# Altium PCB PCB1.PcbDoc
Units mm, origin at the board's own origin, x right, y up, seen from the top; angles counter-clockwise.
Board outline 50 x 50 mm, 2 copper layers (Top Layer, Bottom Layer); 23 components, 14 nets, 73 pads, 4 vias.
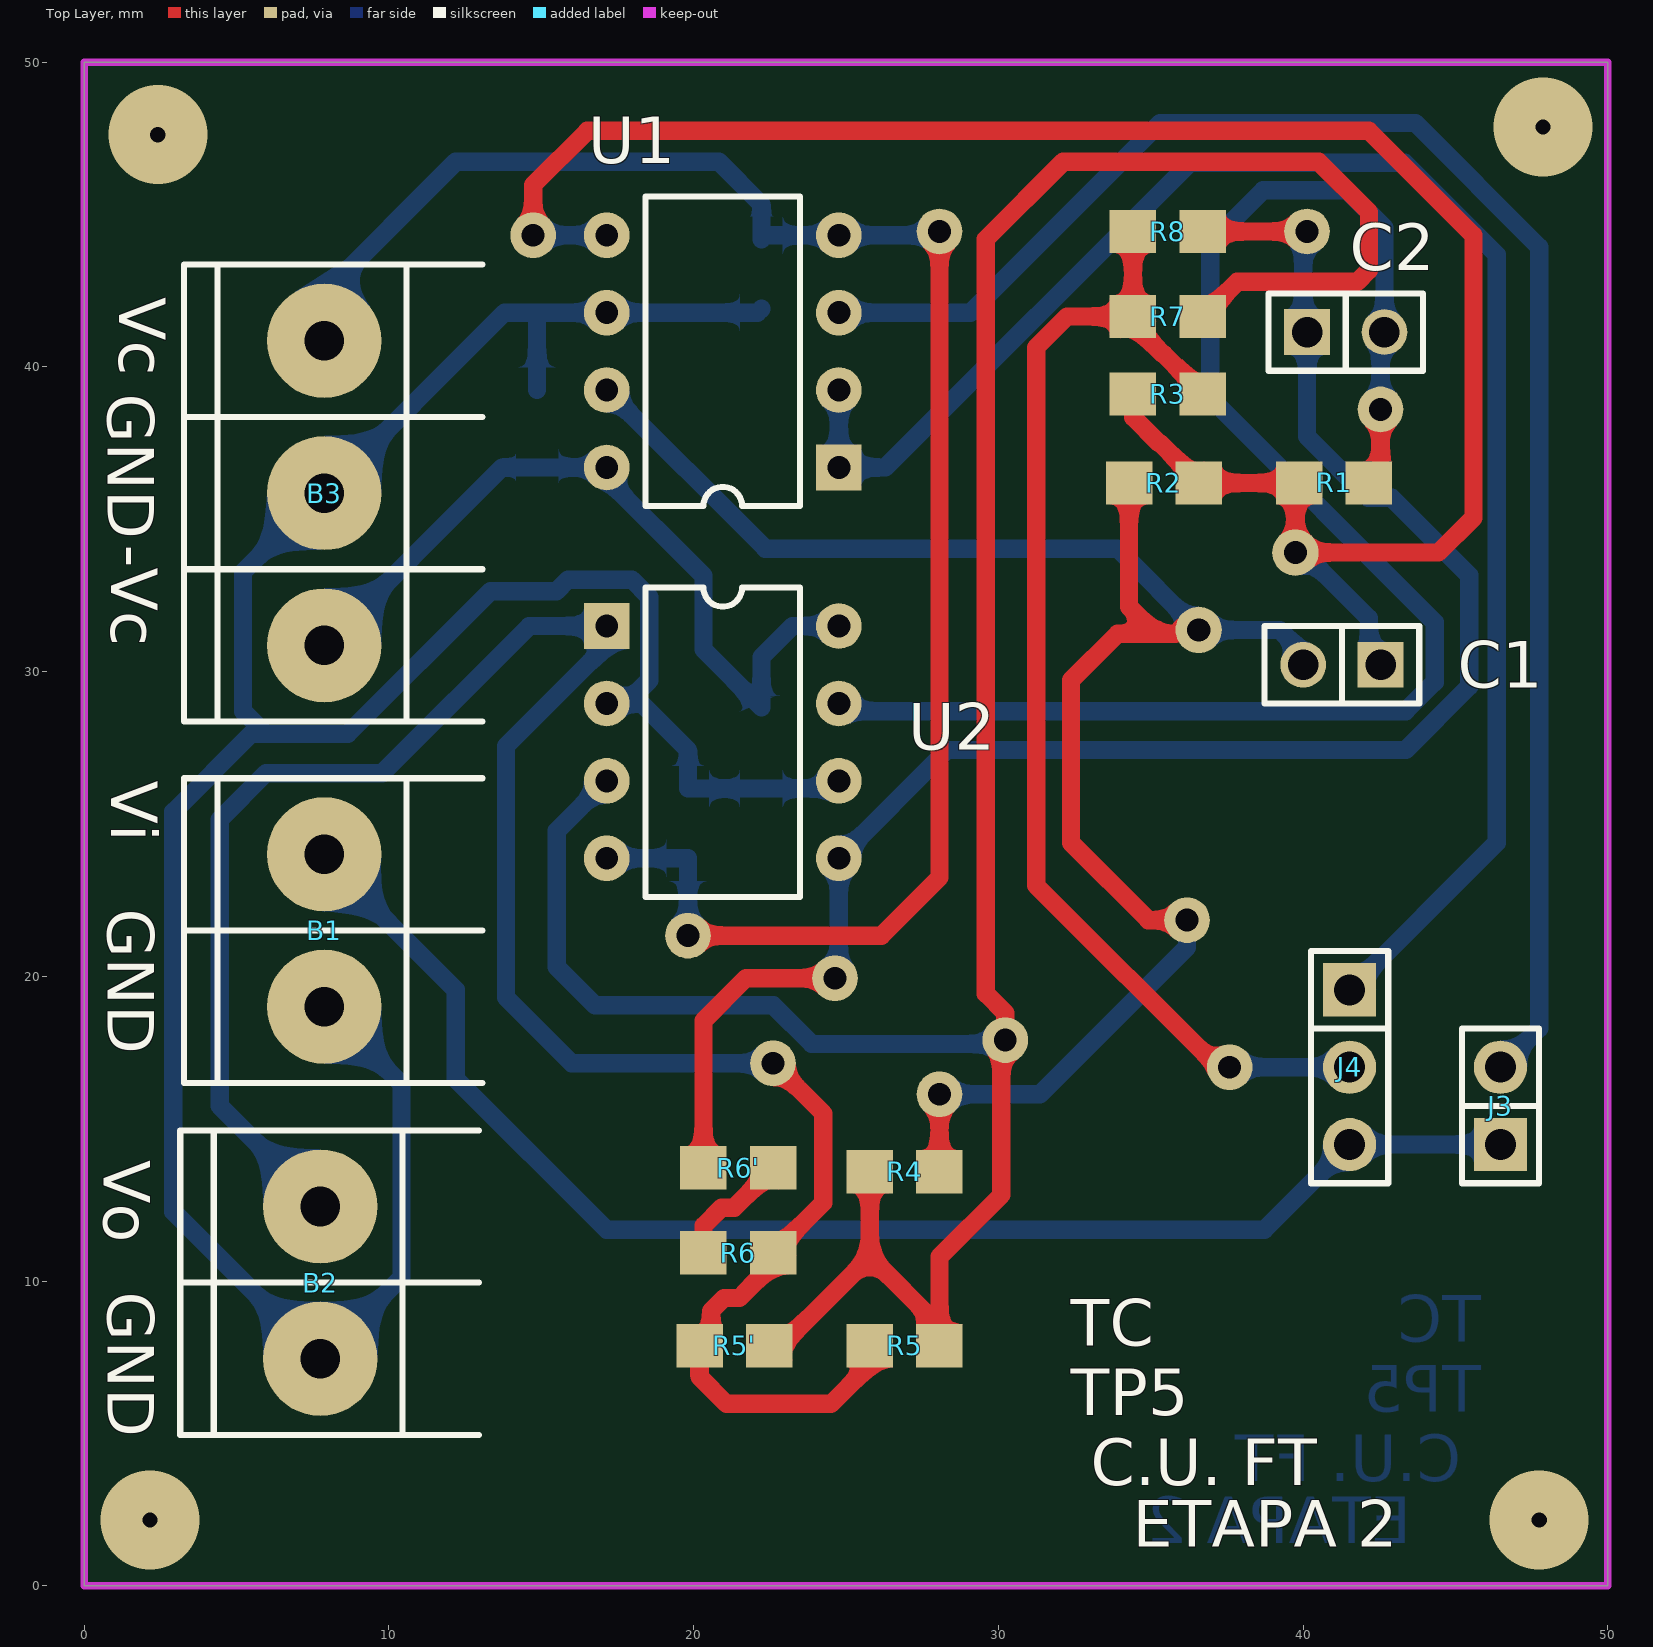
[diagram p0: Top Layer view]
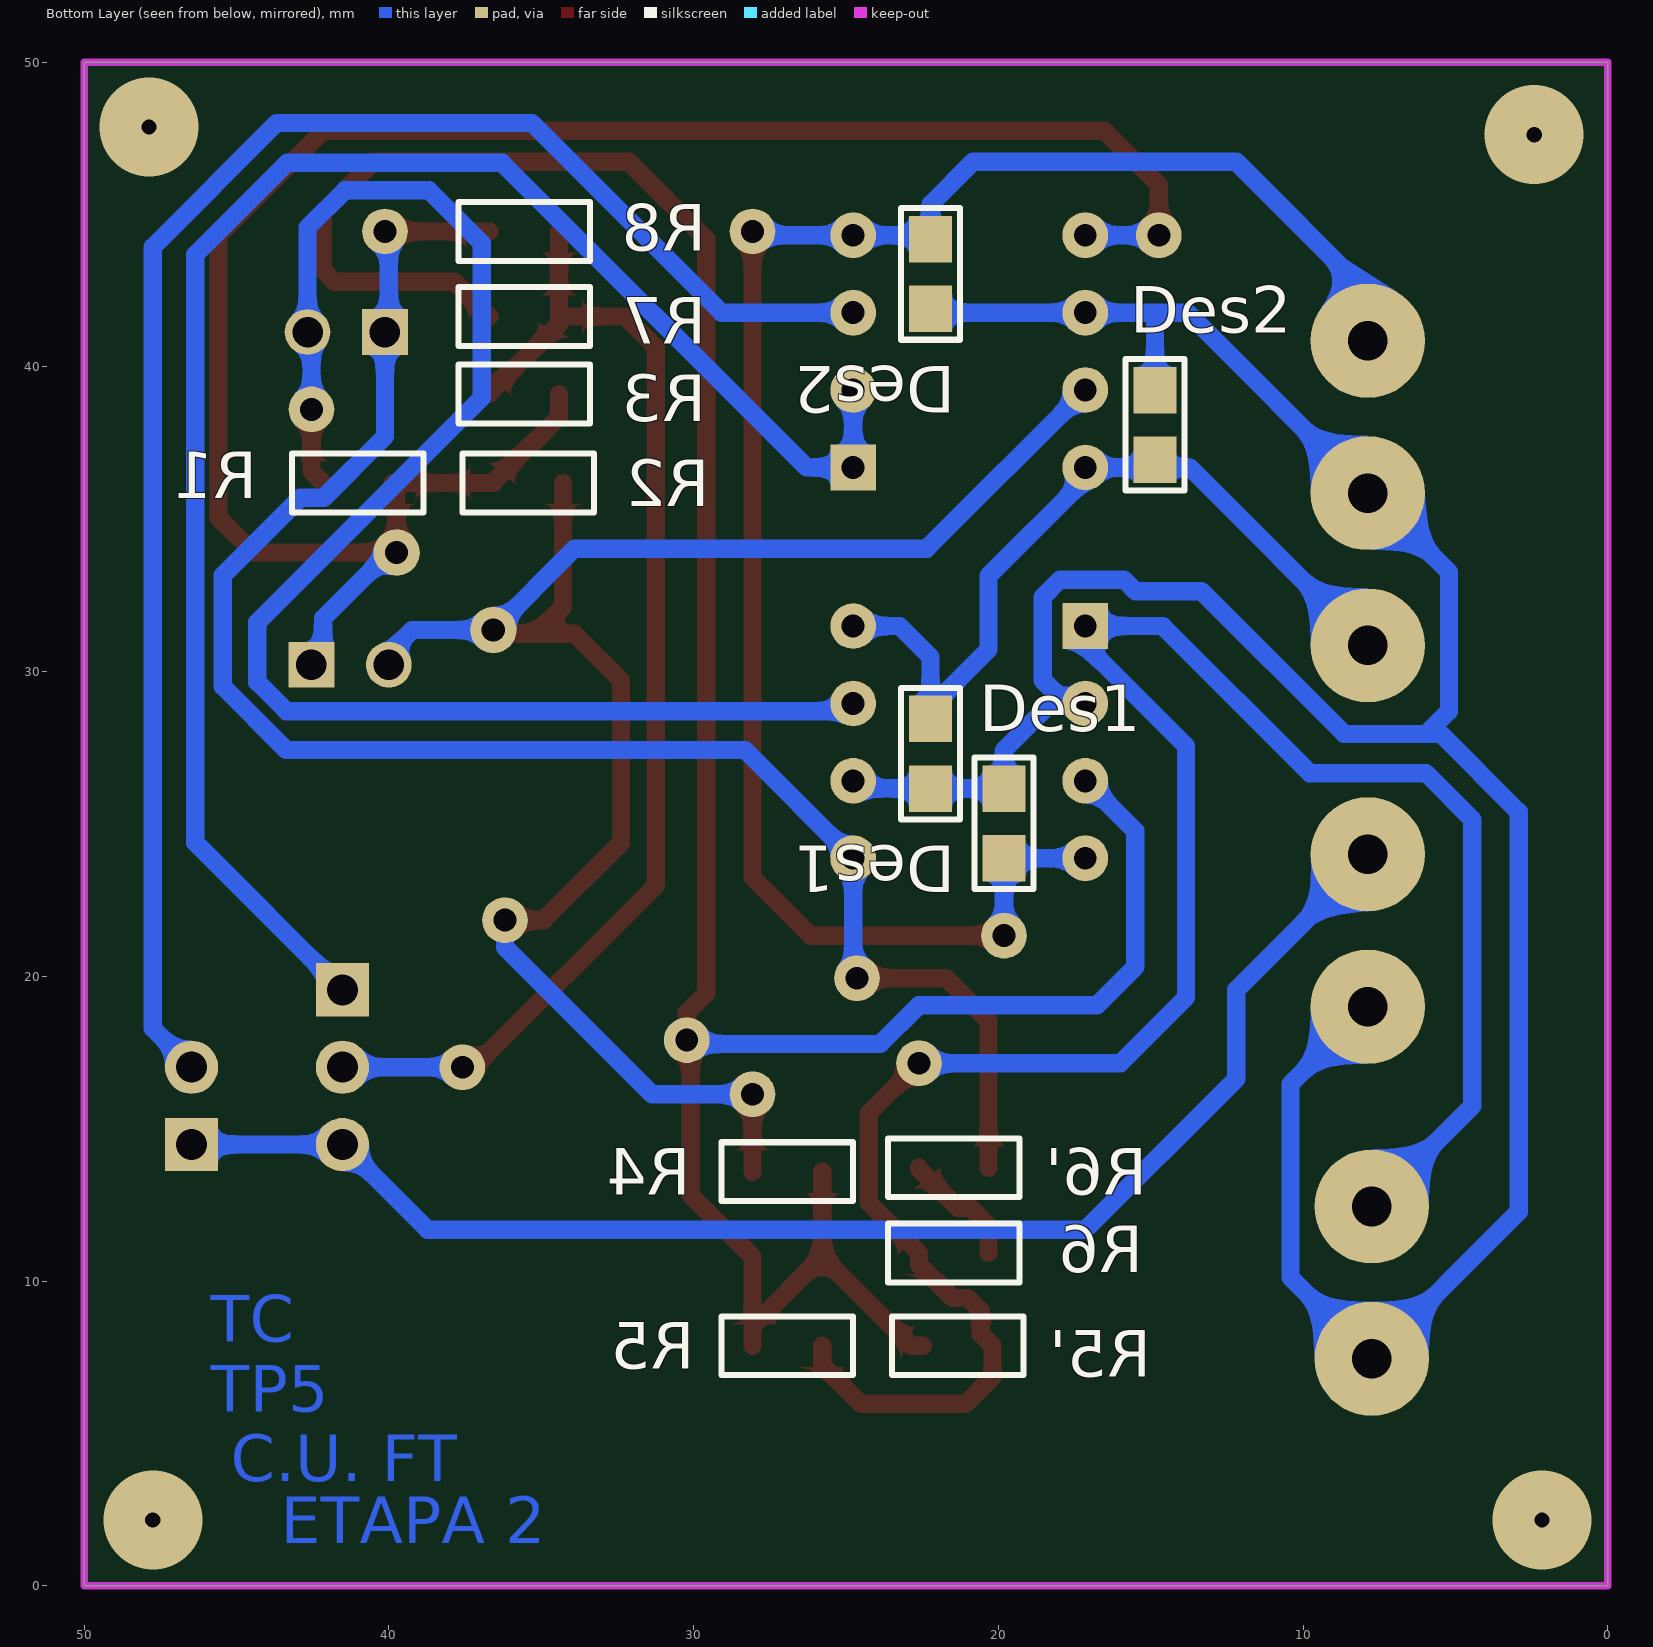
[diagram p1: Bottom Layer view, seen from below]
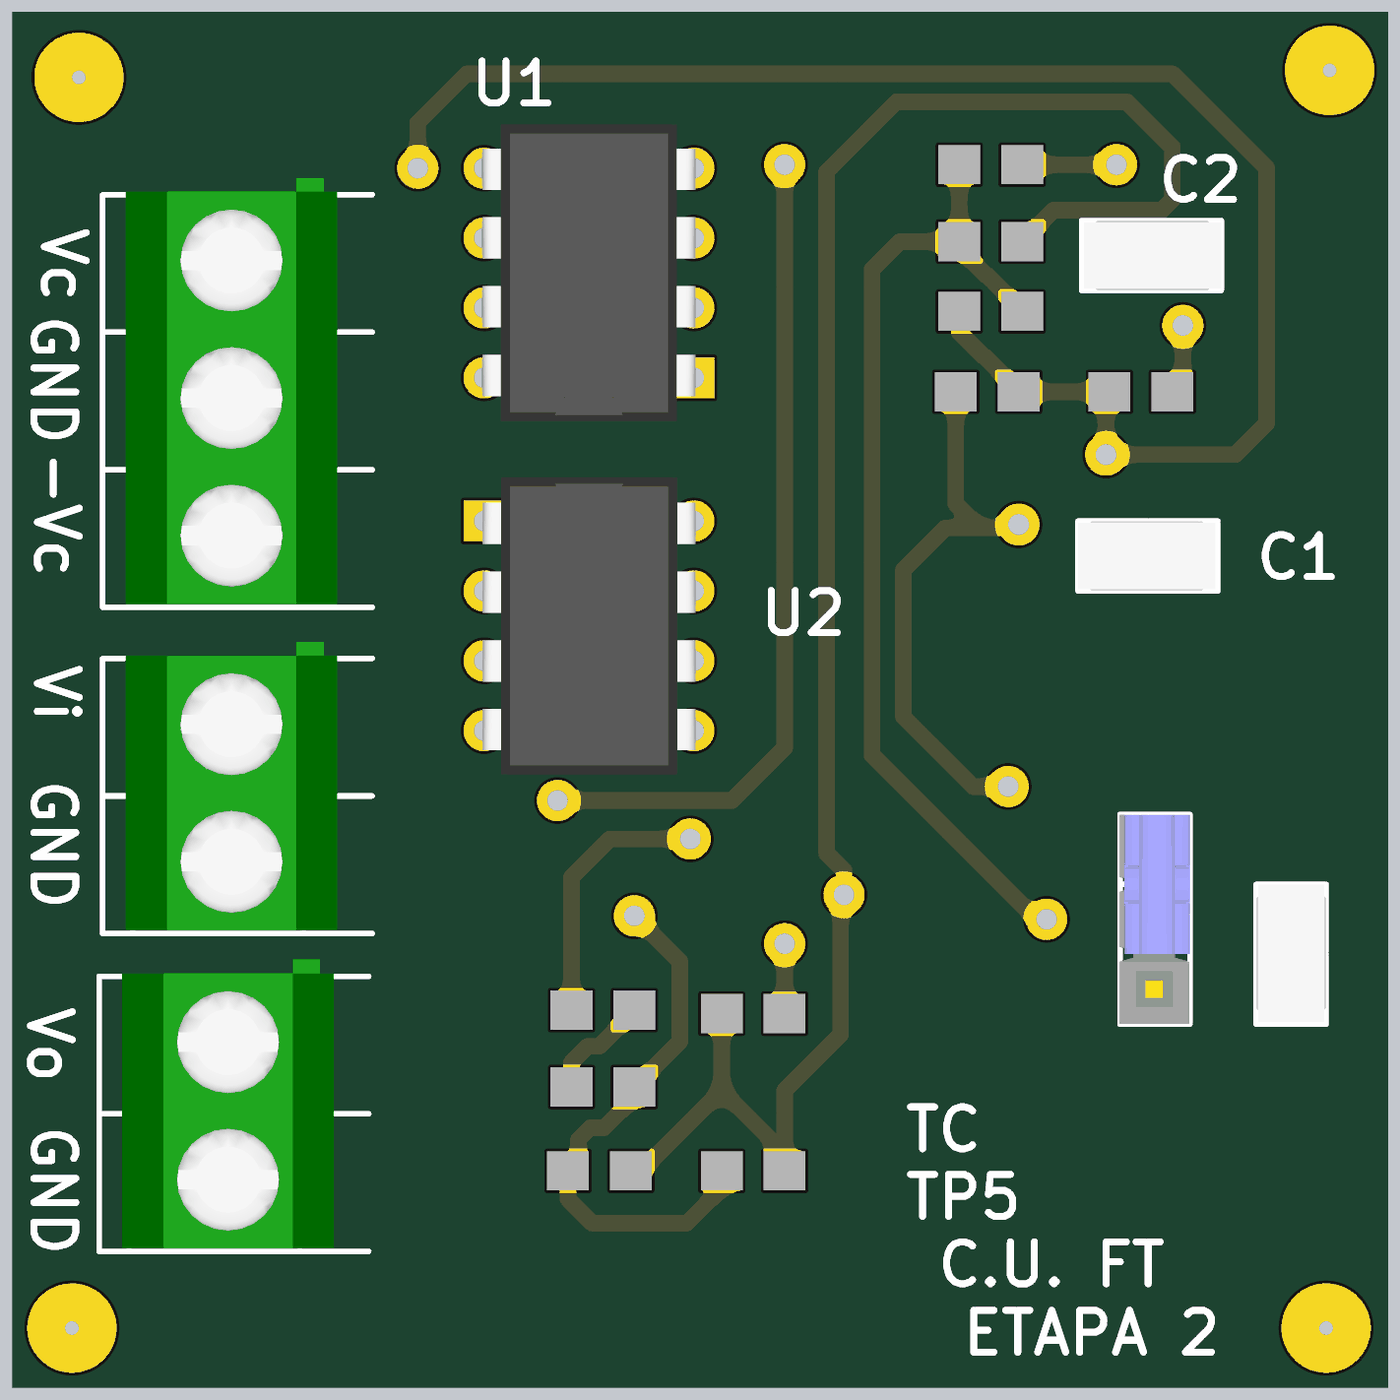
[diagram p2: 3D render of the assembled board from above, using the file's embedded part models]
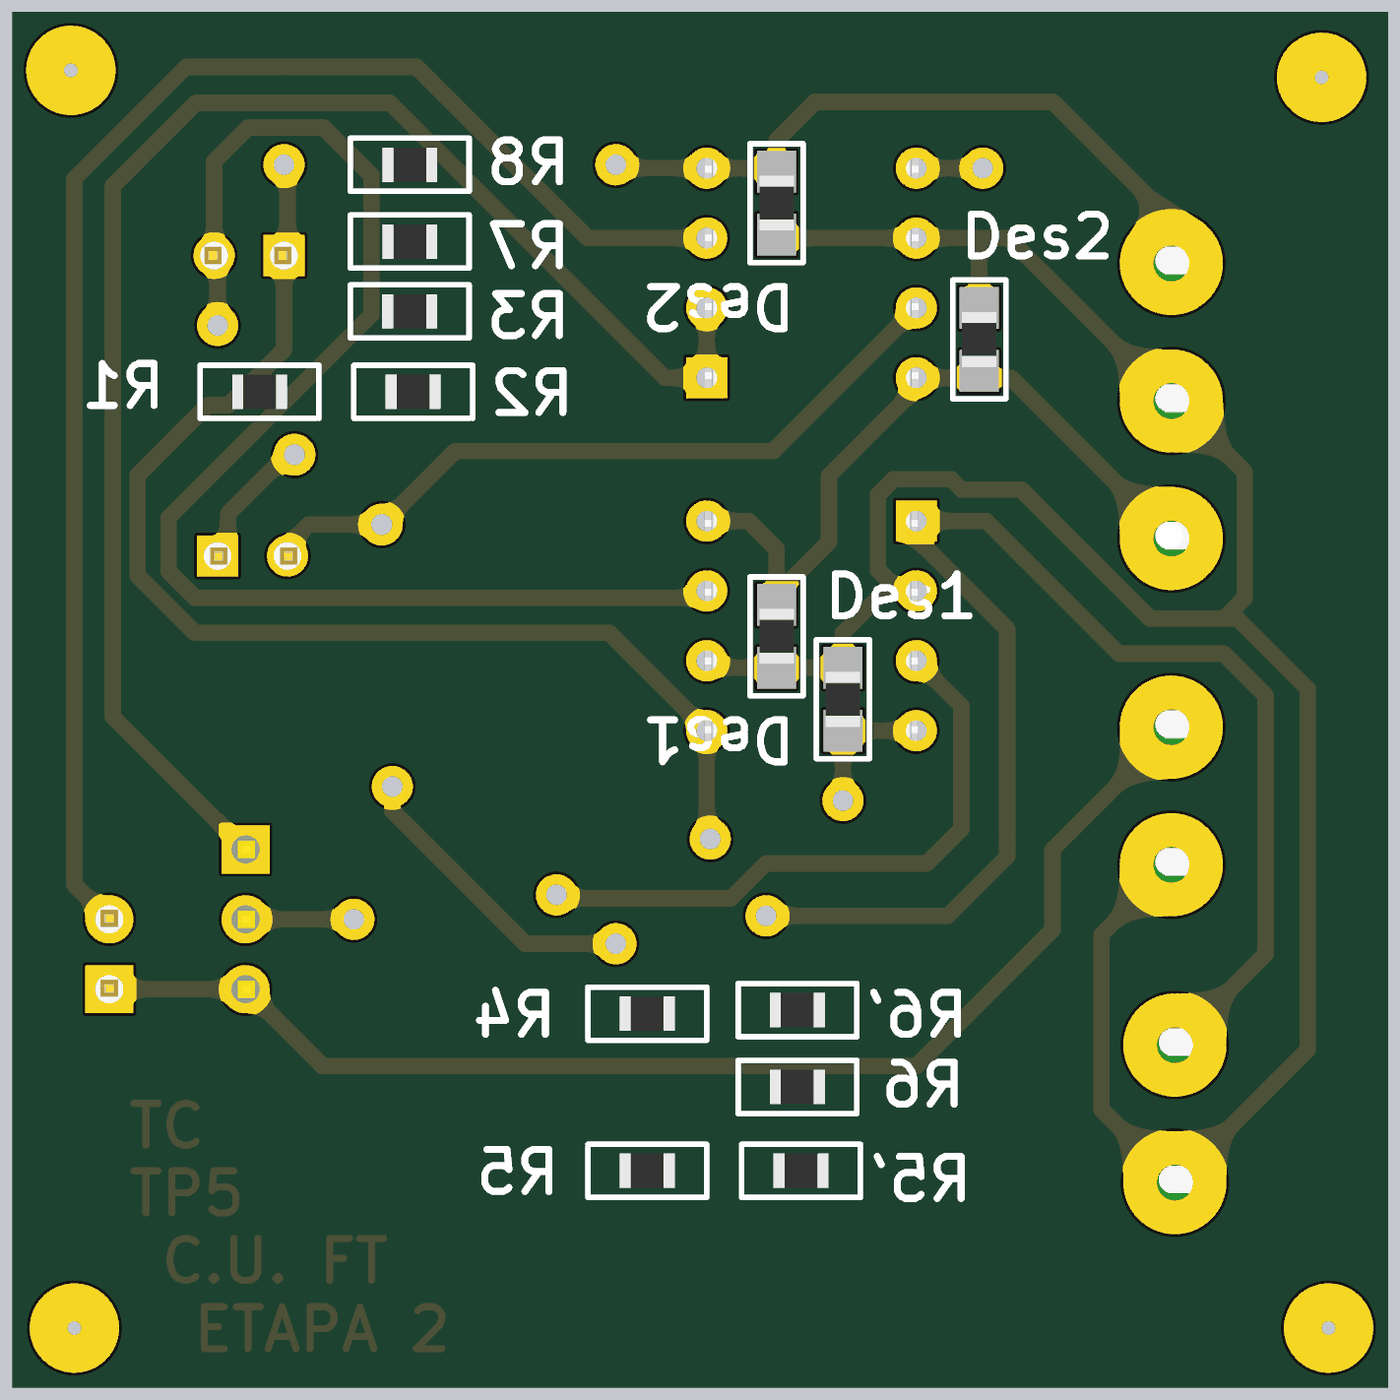
[diagram p3: 3D render of the assembled board from below, using the file's embedded part models]

## Layer stack, top to bottom
Top Solder: solder mask 0.0102, Solder Resist, Dk 3.5
Top Layer: signal copper 0.0356
Dielectric 1: dielectric 0.32, FR-4, Dk 4.8
Bottom Layer: signal copper 0.0356
Bottom Solder: solder mask 0.0102, Solder Resist, Dk 3.5

## Board outline
0,0 50,0 50,50 0,50

## Design rules (kind name [scope] priority, off if disabled: settings)
Clearance [All] p1: gap=0.3 ignorepadtopadclearanceinfootprint=FALSE
PolygonConnect [All] p1: connectstyle=Relief reliefconductorwidth=0.254 reliefentries=4 polygonreliefangle="90 Angle" airgapwidth=0.254
RoutingVias [All] p1: holewidth=0.7 width=2 viastyle="Through Hole" minholewidth=7 minwidth=2 maxholewidth=0.7 maxwidth=2
SolderMaskExpansion [All] p1: expansion=0.102
Width [All] p1: maxlimit=0.6 minlimit=0.6 preferedwidth=0.6
30 further rules are at their usual default settings.

## Classes and differential pairs
component class Sheet1: B1 B2 B3 C1 C2 Des1 Des2 J3 J4 R1 R2 R3 R4 R5 R5' R6 R6' R7 R8 U1 U2

## Components (designator, comment, footprint, x,y, rotation, side; value= is the part's Value field where it differs from the comment)
B1 "BORNERA 2" BORNERA2 7.874,21.503 r0 top
B2 "BORNERA 2" BORNERA2 7.747,9.946 r0 top
B3 "BORNERA 3" BORNERA3 7.874,35.861 r0 top
C1 "JUMPER" JUMPER2#1 41.275,30.226 r180 top
C2 "JUMPER" JUMPER2#1 41.402,41.148 r0 top
Des1 "10n" 0805#1 22.225,27.305 r270 bottom
Des1 "10n" 0805#1 19.812,25.019 r90 bottom
Des2 "10n" 0805#1 22.225,43.053 r270 bottom
Des2 "10n" 0805#1 14.859,38.1 r90 bottom
J3 "JUMPER" JUMPER2#2 46.482,15.748 r90 top
J4 "JUMPER" JUMPER3 41.529,17.018 r270 top
R1 "150" 0805#2 41.021,36.195 r0 bottom
R2 "1.2K" 0805#2 35.433,36.195 r180 bottom
R3 "47K" 0805#2 35.56,39.116 r180 bottom
R4 "1.2K" 0805#2 26.924,13.589 r180 bottom
R5 "1.2M" 0805#2 26.924,7.874 r180 bottom
R5' "68K" 0805#2 21.336,7.874 r180 bottom
R6 "8.2K" 0805#2 21.463,10.922 r180 bottom
R6' "47K" 0805#2 21.463,13.716 r180 bottom
R7 "47K" 0805#2 35.56,41.656 r0 bottom
R8 "47K" 0805#2 35.56,44.45 r0 bottom
U1 "LM833" DIP8 24.765,36.703 r180 top
U2 "LM833" DIP8 17.145,31.496 r0 top

## Footprints (in the part's own frame and the unit in brackets; to place one, negate y for a bottom-side part, rotate by r counter-clockwise, add the part's x,y. Pads: shape width x height; smd on the part's side, far side on the other; paste and mask are expansions set on the pad)
0805#1 [mil] "Pasivo 0805"
  rect 60x56 smd: 1(-45,0) 2(45,0)
  silkscreen extent -85,-38 85,38, body extent -39,-25 39,25, height 15
0805#2 [mil] "Pasivo 0805"
  rect 60x56 smd far side: 1(-45,0) 2(45,0)
  silkscreen extent -85,-38 85,38, body extent -39,-25 39,25, height 15
BORNERA2 [mm] "Bornera con Tornillos 5mm separación"
  round 3.75 hole 1.3: 1(0,2.5) 2(0,-2.5)
  silkscreen extent -4.6,-5 5.2,5, body extent -3.76,-4.89 3.94,5.61, height 10
BORNERA3 [mm] "Bornera con Tornillos 5mm separación"
  round 3.75 hole 1.3: 1(0,5) 2(0,0) 3(0,-5)
  silkscreen extent -4.6,-7.5 5.2,7.5, body extent -3.76,-7.39 3.94,8.11, height 10.05
DIP8 [mm]
  rect 1.5x1.5 hole 0.75: 1(0,0)
  round 1.5 hole 0.75: 2(0,-2.54) 3(0,-5.08) 4(0,-7.62) 5(7.62,-7.62) 6(7.62,-5.08) 7(7.62,-2.54) 8(7.62,0)
  silkscreen extent 1.27,-8.89 6.35,1.27, body extent -0.06,-9.21 7.7,1.59, height 4.5
JUMPER2#1 [mm]
  rect 1.5x1.5 hole 1: 1(-1.27,0)
  round 1.5 hole 1: 2(1.27,0)
  silkscreen extent -2.54,-1.27 2.54,1.27, body extent -2.46,-1.27 2.54,1.27, height 9.5
JUMPER2#2 [mm]
  rect 1.75x1.75 hole 1.016: 1(-1.27,0)
  round 1.75 hole 1.016: 2(1.27,0)
  silkscreen extent -2.54,-1.27 2.54,1.27, body extent -2.46,-1.27 2.54,1.27, height 9.5
JUMPER3 [mm]
  rect 1.75x1.75 hole 1.016: 1(-2.54,0)
  round 1.75 hole 1.016: 2(0,0) 3(2.54,0)
  silkscreen extent -3.81,-1.27 3.81,1.27, body extent -3.81,-1.3 3.81,1.27, height 16.15

## Part data
Des1 Des1 Des2 Des2: library part CAP
J4: library part JUMPER3
R1 R2 R3 R4 R5 R5' R6 R6' R7 R8: library part RES
U1 U2: "Dual Audio Operational Amplifier"

## Free pads (board coordinates)
  round 1.5 hole 0.75: 14(40.132,44.45) 15(42.545,38.608) 18(22.606,17.145) 19(24.638,19.939) 20(30.226,17.907) 21(37.592,17.018) 22(19.812,21.336) 23(28.067,44.45) 24(14.732,44.323) 26(28.067,16.129) 27(36.195,21.844)
  round 1.524 hole 0.762: 16(36.576,31.369) 17(39.751,33.909)

## Via types
v1: diameter 3.25, hole 0.5, Top Layer to Bottom Layer, 4 vias

## Nets (pads, with @x,y where several pads share a name; then routed paths per layer and width w, separated by ;. In a path a pad name is that pad's centre, name@x,y a point inside that pad or via, vN(x,y) a via of type N, cw(c..) or ccw(c..) an arc to the next point about the centre after c; other vN are vias at no path point)
-VCC: B3.3 Des1.1@22.225,28.448 Des2.1@14.859,36.957 U1.8 U2.8 | length 26.3
  Bottom Layer w0.6: B3.3 13.716,36.703 U1.8 17.145,36.322 20.32,33.147 20.32,30.734 22.225,28.829 22.225,30.48 23.241,31.496 U2.8
GND: B1.2 B2.2 B3.2 Des1.2 Des2.2 U1.6 U2.2 U2.6 | length 94.5
  Bottom Layer w0.6: B1.2 10.414,16.463 10.414,10.113 B2.2 2.921,12.272 2.921,25.4 5.472,27.951 5.958,27.951 ; Des2.2@14.859,39.243 14.859,41.402 ; U2.2 U2.2@17.78,28.956 ; Des2.2@22.225,41.91 22.098,41.783 U1.6 13.796,41.783 B3.2 7.794,35.861 5.207,33.274 5.207,28.702 5.958,27.951 ; U2.6 24.511,26.162 22.225,26.162 19.812,26.162 19.812,27.432 18.288,28.956 U2.2@17.78,28.956 ; 5.958,27.951 8.644,27.951 13.332,32.639 15.494,32.639 15.875,33.02 17.97,33.02 18.542,32.448 18.542,29.718 U2.2@17.78,28.956
NetC1_1: C1.1 pad.17 pad.24 R1.1 R2.1 R3.2 U1.5 | length 66.5
  Top Layer w0.6: pad.24 14.732,45.974 16.51,47.752 42.164,47.752 45.593,44.323 45.593,35.052 44.45,33.909 pad.17 39.751,36.068 R1.1 R2.1 36.576,36.231 35.301,37.506 35.265,37.506 34.417,38.354 R3.2
  Bottom Layer w0.6: pad.24 U1.5 ; pad.17@40.259,33.655 42.164,31.75 42.164,30.607 C1.1
NetC1_2: C1.2 pad.16 pad.26 pad.27 R2.2 R4.1 U1.7 | length 60.1
  Top Layer w0.6: R4.1 pad.26 ; R2.2 34.29,32.131 35.179,31.242 ; pad.16@36.068,31.496 35.814,31.242 35.179,31.242 ; pad.27 34.925,21.844 32.385,24.384 32.385,29.718 33.909,31.242 35.179,31.242
  Bottom Layer w0.6: U1.7 22.352,34.036 33.909,34.036 pad.16 39.243,31.369 40.005,30.607 C1.2 ; pad.26 31.369,16.129 36.195,20.955 pad.27@36.195,21.59
NetC2_1: C2.1 pad.14 pad.19 R6'.2 R8.2 U2.5 | length 58.3
  Top Layer w0.6: R6'.2 20.32,18.542 21.717,19.939 pad.19 ; R8.2 pad.14
  Bottom Layer w0.6: pad.19 24.765,20.066 U2.5 28.321,27.432 43.372,27.432 45.455,29.515 45.455,33.164 42.91,35.709 42.142,35.709 40.132,37.719 C2.1 C2.1@40.132,41.275 ; C2.1@40.005,40.767 40.005,44.323 pad.14
NetC2_2: C2.2 pad.15 R1.2 U2.7 | length 53.1
  Top Layer w0.6: R1.2 42.545,36.576 pad.15
  Bottom Layer w0.6: U2.7 25.019,28.702 43.37,28.702 44.323,29.655 44.323,31.623 36.957,38.989 36.957,44.069 38.688,45.8 41.449,45.8 42.672,44.577 42.672,41.275 42.545,41.148 pad.15
NetJ3_2: J3.2 U1.3 | length 54.7
  Bottom Layer w0.6: U1.3 29.083,41.783 35.306,48.006 43.688,48.006 47.752,43.942 47.752,18.288 J3.2
NetJ4_1: J4.1 U1.1 U1.2 | length 55.6
  Bottom Layer w0.6: U1.2 U1.1 26.289,36.703 36.286,46.7 43.343,46.7 46.355,43.688 46.355,24.384 J4.1
NetR4_2: pad.20 R4.2 R5'.1 R5.1 R7.2 U2.3 | length 92.9
  Top Layer w0.6: R5'.1 22.86,7.874 25.781,10.795 ; R4.2 25.781,10.795 ; R5.1 R5.1@28.067,8.509 ; R7.2 37.846,42.799 41.783,42.799 42.164,43.18 42.164,45.085 40.513,46.736 32.131,46.736 29.591,44.196 29.591,19.431 30.226,18.796 pad.20 30.099,17.78 30.099,12.827 28.067,10.795 R5.1@28.067,8.509 ; 25.781,10.795 R5.1@28.067,8.509
  Bottom Layer w0.6: U2.3 15.505,24.776 15.505,20.309 16.764,19.05 22.61,19.05 23.88,17.78 30.099,17.78 pad.20
NetR6'_1: R6'.1 R6.2 | length 4
  Top Layer w0.6: R6.2 20.32,11.811 20.914,12.405 21.331,12.405 22.606,13.68 R6'.1
V1: J4.2 pad.21 R3.1 R7.1 R8.1 | length 40.3
  Top Layer w0.6: R8.1 R7.1 ; R3.1 36.703,39.152 35.428,40.427 35.392,40.427 34.417,41.402 R7.1 ; pad.21 37.211,17.018 31.242,22.987 31.242,40.64 32.258,41.656 R7.1
  Bottom Layer w0.6: pad.21 J4.2
VCC: B3.1 Des1.1@19.812,23.876 Des2.1@22.225,44.196 pad.22 pad.23 U1.4 U2.4 | length 60.8
  Top Layer w0.6: pad.22 26.162,21.336 28.067,23.241 pad.23
  Bottom Layer w0.6: B3.1 7.874,42.418 12.192,46.736 20.828,46.736 22.225,45.339 22.225,44.196 22.352,44.323 U1.4 27.94,44.323 pad.23 ; U2.4 19.812,23.876 pad.22
Vi: B1.1 J3.1 J4.3 | length 46.7
  Bottom Layer w0.6: B1.1 7.874,23.876 12.192,19.558 12.192,16.637 17.145,11.684 38.735,11.684 J4.3 J3.1
Vo: B2.1 pad.18 R5'.2 R5.2 R6.1 U2.1 | length 72.7
  Top Layer w0.6: pad.18 24.257,15.494 24.257,12.573 R6.1 22.606,10.541 21.504,9.439 20.996,9.439 20.574,9.017 20.574,8.255 R5'.2 20.193,6.858 21.082,5.969 24.511,5.969 25.781,7.239 R5.2
  Bottom Layer w0.6: B2.1 4.445,15.748 4.445,25.146 5.969,26.67 9.779,26.67 14.605,31.496 U2.1 17.145,30.861 16.59,30.306 16.586,30.306 15.795,29.515 15.795,29.511 13.843,27.559 13.843,19.304 16.002,17.145 pad.18
copper on no net:
  other v1: 2.159,2.159 47.752,2.159 2.413,47.625 47.879,47.879

## Keep-outs
Keep-Out Layer:
  the board outline again, w0.254

## Other copper
Bottom Layer:
  text "TC / TP5 /  C.U. FT" at 45.847,3.429 h1.52
  text "ETAPA 2" at 43.561,1.397 h1.52

## Silkscreen, mask and mechanical layers (free items; w line width, h text height)
Top Overlay:
  text "Vc" at 1.143,42.291 h1.52 r270
  text "GND" at 0.762,39.116 h1.52 r270
  text "-Vc" at 0.889,34.163 h1.52 r270
  text "Vi" at 0.889,26.416 h1.52 r270
  text "GND" at 0.762,22.225 h1.52 r270
  text "Vo" at 0.635,13.97 h1.52 r270
  text "GND" at 0.762,9.652 h1.52 r270
  text "TC / TP5 /  C.U. FT" at 32.385,3.302 h1.52
  text "ETAPA 2" at 34.417,1.27 h1.52